# Altium PCB Hack_Final.PcbDoc (part 3 of 3)
Units mm, origin at the board's own origin, x right, y up, seen from the top; angles counter-clockwise.
Board outline 325.37 x 149.48 mm, 4 copper layers (Top Layer, Layer 1, Layer 2, Bottom Layer), stack 0.603 mm thick; 363 components, 196 nets, 927 pads, 198 vias.
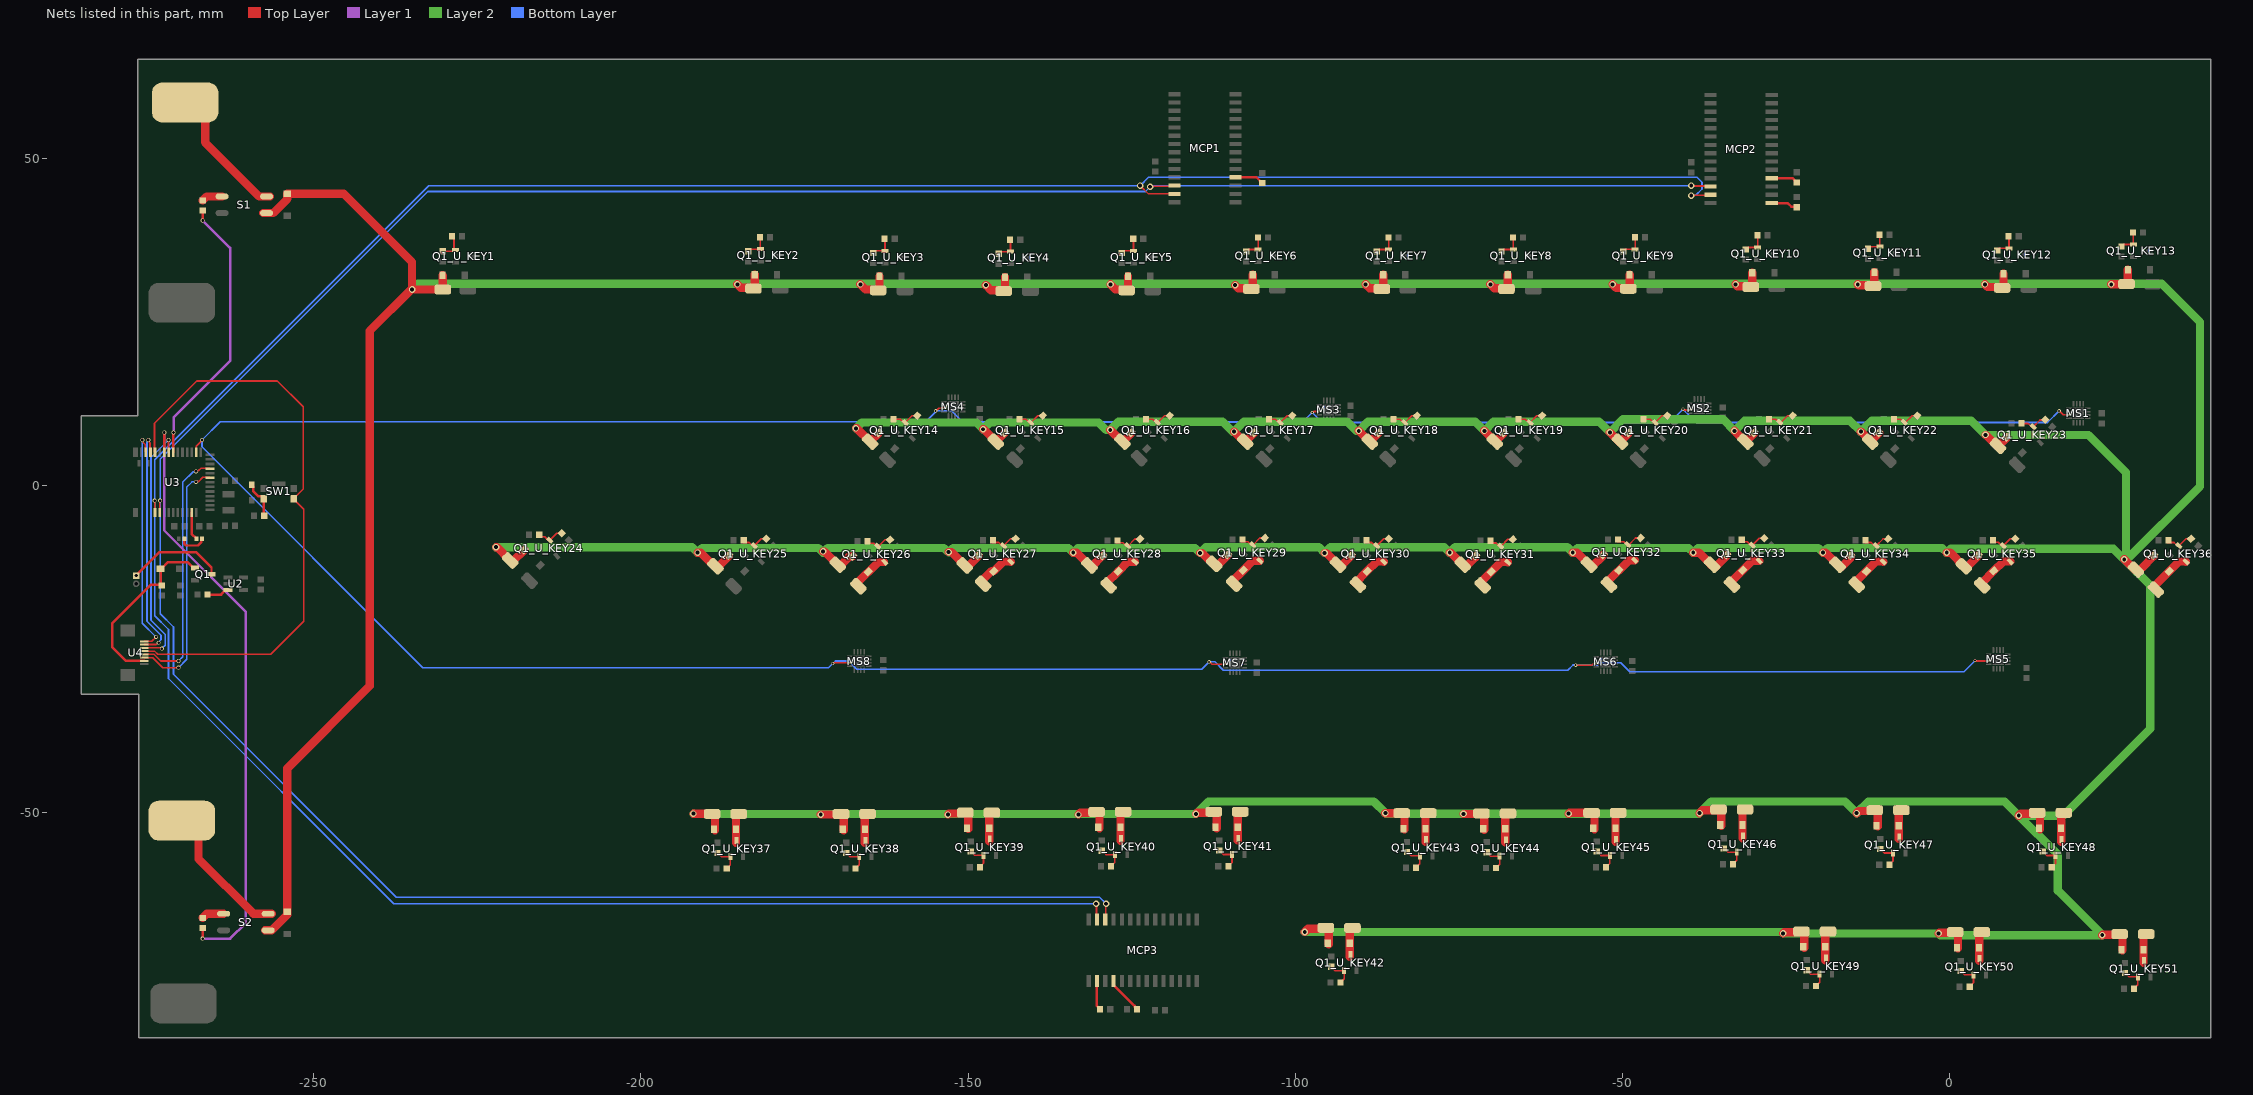
[diagram p5: the nets of this part, all layers, seen from the top]

## Via types
v1: diameter 0.5, hole 0.3, Top Layer to Bottom Layer, 91 vias
v2: diameter 1, hole 0.6, Top Layer to Bottom Layer, 72 vias
v3: diameter 0.6, hole 0.4, Top Layer to Bottom Layer, 35 vias

## Nets (pads, with @x,y where several pads share a name; then routed paths per layer and width w, separated by ;. In a path a pad name is that pad's centre, name@x,y a point inside that pad or via, vN(x,y) a via of type N, cw(c..) or ccw(c..) an arc to the next point about the centre after c; other vN are vias at no path point) (continued)
NetD1_U_KEY26_2: D1_U_KEY26.2 P-_U_KEY26.1 Q1_U_KEY26.3 | length 5.6
  Top Layer w1.27: P-_U_KEY26.1@-167.025,-14.986 -163.707,-11.668 Q1_U_KEY26.3@-162.83,-11.668
NetD1_U_KEY27_2: D1_U_KEY27.2 P-_U_KEY27.1 Q1_U_KEY27.3 | length 6.2
  Top Layer w1.27: P-_U_KEY27.1@-147.701,-14.986 -147.917,-14.77 -147.917,-14.59 -146.38,-13.053 D1_U_KEY27.2@-146.041,-13.053 -144.572,-11.584 -143.52,-11.584 Q1_U_KEY27.3@-143.496,-11.607
NetD1_U_KEY28_2: D1_U_KEY28.2 P-_U_KEY28.1 Q1_U_KEY28.3 | length 5.7
  Top Layer w1.27: P-_U_KEY28.1@-128.841,-14.888 D1_U_KEY28.2@-127.035,-13.082 -125.566,-11.613 -124.514,-11.613 Q1_U_KEY28.3@-124.49,-11.637
NetD1_U_KEY29_2: D1_U_KEY29.2 P-_U_KEY29.1 Q1_U_KEY29.3 | length 5.7
  Top Layer w1.27: P-_U_KEY29.1@-109.748,-14.732 D1_U_KEY29.2@-107.941,-12.926 -106.472,-11.457 -105.42,-11.457 Q1_U_KEY29.3@-105.396,-11.48
NetD1_U_KEY30_2: D1_U_KEY30.2 P-_U_KEY30.1 Q1_U_KEY30.3 | length 5.7
  Top Layer w1.27: P-_U_KEY30.1@-90.825,-14.859 D1_U_KEY30.2@-89.018,-13.053 -87.549,-11.584 -86.497,-11.584 Q1_U_KEY30.3@-86.473,-11.607
NetD1_U_KEY31_2: D1_U_KEY31.2 P-_U_KEY31.1 Q1_U_KEY31.3 | length 5.5
  Top Layer w1.27: P-_U_KEY31.1@-71.628,-14.859 -71.628,-14.712 D1_U_KEY31.2@-70.05,-13.135 -68.581,-11.665 -67.529,-11.665 Q1_U_KEY31.3@-67.505,-11.689
NetD1_U_KEY32_2: D1_U_KEY32.2 P-_U_KEY32.1 Q1_U_KEY32.3 | length 5.6
  Top Layer w1.27: P-_U_KEY32.1@-52.344,-14.732 -49.026,-11.414 Q1_U_KEY32.3@-48.149,-11.414
NetD1_U_KEY33_2: D1_U_KEY33.2 P-_U_KEY33.1 Q1_U_KEY33.3 | length 5.7
  Top Layer w1.27: P-_U_KEY33.1@-33.464,-14.761 D1_U_KEY33.2@-31.658,-12.955 -30.189,-11.486 -29.137,-11.486 Q1_U_KEY33.3@-29.113,-11.51
NetD1_U_KEY34_2: D1_U_KEY34.2 P-_U_KEY34.1 Q1_U_KEY34.3 | length 5.7
  Top Layer w1.27: P-_U_KEY34.1@-14.526,-14.868 D1_U_KEY34.2@-12.72,-13.061 -11.25,-11.592 -10.198,-11.592 Q1_U_KEY34.3@-10.174,-11.616
NetD1_U_KEY35_2: D1_U_KEY35.2 P-_U_KEY35.1 Q1_U_KEY35.3 | length 5.7
  Top Layer w1.27: P-_U_KEY35.1@4.905,-14.843 D1_U_KEY35.2@6.711,-13.037 8.181,-11.568 9.233,-11.568 Q1_U_KEY35.3@9.257,-11.591
NetD1_U_KEY36_2: D1_U_KEY36.2 P-_U_KEY36.1 Q1_U_KEY36.3 | length 5.7
  Top Layer w1.27: 31.75,-14.859 35.025,-11.584 36.078,-11.584 Q1_U_KEY36.3@36.101,-11.607
NetD1_U_KEY37_2: D1_U_KEY37.2 P-_U_KEY37.1 Q1_U_KEY37.3 | length 4.3
  Top Layer w1.27: Q1_U_KEY37.3@-185.445,-54.566 D1_U_KEY37.2@-185.445,-52.534 P-_U_KEY37.1@-185.445,-50.289 ; P-_U_KEY37.1@-185.359,-50.121 P-_U_KEY37.1@-185.318,-50.162
NetD1_U_KEY38_2: D1_U_KEY38.2 P-_U_KEY38.1 Q1_U_KEY38.3 | length 4.3
  Top Layer w1.27: Q1_U_KEY38.3@-165.76,-54.566 D1_U_KEY38.2@-165.76,-52.534 P-_U_KEY38.1@-165.76,-50.289 ; P-_U_KEY38.1@-165.674,-50.121 P-_U_KEY38.1@-165.633,-50.162
NetD1_U_KEY39_2: D1_U_KEY39.2 P-_U_KEY39.1 Q1_U_KEY39.3 | length 4.3
  Top Layer w1.27: Q1_U_KEY39.3@-146.771,-54.356 D1_U_KEY39.2@-146.771,-52.324 P-_U_KEY39.1@-146.771,-50.079 ; P-_U_KEY39.1@-146.685,-49.911 P-_U_KEY39.1@-146.644,-49.952
NetD1_U_KEY40_2: D1_U_KEY40.2 P-_U_KEY40.1 Q1_U_KEY40.3 | length 4.3
  Top Layer w1.27: Q1_U_KEY40.3@-126.708,-54.246 D1_U_KEY40.2@-126.708,-52.214 P-_U_KEY40.1@-126.708,-49.97 ; P-_U_KEY40.1@-126.622,-49.801 P-_U_KEY40.1@-126.581,-49.843
NetD1_U_KEY41_2: D1_U_KEY41.2 P-_U_KEY41.1 Q1_U_KEY41.3 | length 4.3
  Top Layer w1.27: Q1_U_KEY41.3@-108.798,-54.229 D1_U_KEY41.2@-108.798,-52.197 P-_U_KEY41.1@-108.798,-49.952 ; P-_U_KEY41.1@-108.712,-49.784 P-_U_KEY41.1@-108.671,-49.825
NetD1_U_KEY42_2: D1_U_KEY42.2 P-_U_KEY42.1 Q1_U_KEY42.3 | length 4.3
  Top Layer w1.27: Q1_U_KEY42.3@-91.669,-71.973 D1_U_KEY42.2@-91.669,-69.941 P-_U_KEY42.1@-91.669,-67.696 ; P-_U_KEY42.1@-91.584,-67.528 P-_U_KEY42.1@-91.542,-67.569
NetD1_U_KEY43_2: D1_U_KEY43.2 P-_U_KEY43.1 Q1_U_KEY43.3 | length 4.3
  Top Layer w1.27: Q1_U_KEY43.3@-80.096,-54.448 D1_U_KEY43.2@-80.096,-52.416 P-_U_KEY43.1@-80.096,-50.171 ; P-_U_KEY43.1@-80.01,-50.003 P-_U_KEY43.1@-79.969,-50.044
NetD1_U_KEY44_2: D1_U_KEY44.2 P-_U_KEY44.1 Q1_U_KEY44.3 | length 4.3
  Top Layer w1.27: Q1_U_KEY44.3@-67.904,-54.483 D1_U_KEY44.2@-67.904,-52.451 P-_U_KEY44.1@-67.904,-50.206 ; P-_U_KEY44.1@-67.818,-50.038 P-_U_KEY44.1@-67.777,-50.079
NetD1_U_KEY45_2: D1_U_KEY45.2 P-_U_KEY45.1 Q1_U_KEY45.3 | length 4.3
  Top Layer w1.27: Q1_U_KEY45.3@-51.074,-54.391 D1_U_KEY45.2@-51.074,-52.359 P-_U_KEY45.1@-51.074,-50.114 ; P-_U_KEY45.1@-50.988,-49.946 P-_U_KEY45.1@-50.947,-49.987
NetD1_U_KEY46_2: D1_U_KEY46.2 P-_U_KEY46.1 Q1_U_KEY46.3 | length 4.3
  Top Layer w1.27: Q1_U_KEY46.3@-31.677,-53.883 D1_U_KEY46.2@-31.677,-51.851 P-_U_KEY46.1@-31.677,-49.606 ; P-_U_KEY46.1@-31.591,-49.438 P-_U_KEY46.1@-31.55,-49.479
NetD1_U_KEY47_2: D1_U_KEY47.2 P-_U_KEY47.1 Q1_U_KEY47.3 | length 4.3
  Top Layer w1.27: Q1_U_KEY47.3@-7.806,-53.993 D1_U_KEY47.2@-7.806,-51.961 P-_U_KEY47.1@-7.806,-49.716 ; P-_U_KEY47.1@-7.72,-49.548 P-_U_KEY47.1@-7.679,-49.589
NetD1_U_KEY48_2: D1_U_KEY48.2 P-_U_KEY48.1 Q1_U_KEY48.3 | length 4.3
  Top Layer w1.27: Q1_U_KEY48.3@17.019,-54.391 D1_U_KEY48.2@17.019,-52.359 P-_U_KEY48.1@17.019,-50.114 ; P-_U_KEY48.1@17.104,-49.946 P-_U_KEY48.1@17.146,-49.987
NetD1_U_KEY49_2: D1_U_KEY49.2 P-_U_KEY49.1 Q1_U_KEY49.3 | length 4.3
  Top Layer w1.27: Q1_U_KEY49.3@-19.009,-72.517 D1_U_KEY49.2@-19.009,-70.485 P-_U_KEY49.1@-19.009,-68.24 ; P-_U_KEY49.1@-18.923,-68.072 P-_U_KEY49.1@-18.882,-68.113
NetD1_U_KEY50_2: D1_U_KEY50.2 P-_U_KEY50.1 Q1_U_KEY50.3 | length 4.3
  Top Layer w1.27: Q1_U_KEY50.3@4.486,-72.609 D1_U_KEY50.2@4.486,-70.577 P-_U_KEY50.1@4.486,-68.332 ; P-_U_KEY50.1@4.572,-68.164 P-_U_KEY50.1@4.613,-68.205
NetD1_U_KEY51_2: D1_U_KEY51.2 P-_U_KEY51.1 Q1_U_KEY51.3 | length 4.3
  Top Layer w1.27: Q1_U_KEY51.3@29.611,-72.915 D1_U_KEY51.2@29.611,-70.883 P-_U_KEY51.1@29.611,-68.639 ; P-_U_KEY51.1@29.696,-68.47 P-_U_KEY51.1@29.738,-68.512
NetD2_1: D2.1 R5.1 SW1.1 | length 5.8
  Top Layer w0.381: D2.1@-259.437,0.16 -259.437,0.075 -259.207,-0.155 -259.207,-0.886 -258.439,-1.654 -257.937,-1.654 -257.627,-1.964 SW1.1@-257.627,-2.014 -257.584,-2.057 -257.584,-4.528 R5.1@-257.54,-4.572
NetL1_1: L1.1 U3.10 | length 4.3
  Top Layer w0.381: U3.10@-268.626,-4.092 -268.626,-7.364 -267.887,-8.103 L1.1@-267.887,-8.128
NetL1_2: L1.2 L2.1 | length 4.2
  Top Layer w0.381: L2.1@-269.748,-8.128 -269.748,-8.89 -269.494,-9.144 -267.649,-9.144 -267.142,-8.637 -267.142,-8.234 L1.2@-267.037,-8.128
NetMCP1_18: MCP1.18 R6.2 | length 4.5
  Top Layer w0.381: MCP1.18@-109.117,47.117 -105.951,47.117 -105.054,46.22 R6.2@-105.029,46.22
NetMCP2_15: MCP2.15 R8.1 | length 4.1
  Top Layer w0.381: MCP2.15@-27.202,43.18 -24.765,43.18 -24.206,42.621 -23.452,42.621 R8.1@-23.368,42.537
NetMCP2_18: MCP2.18 R7.2 | length 4.1
  Top Layer w0.381: MCP2.18@-27.202,46.99 -24.036,46.99 -23.393,46.347 R7.2@-23.368,46.347
NetMCP3_16: MCP3.16 R10.1 | length 4.5
  Top Layer w0.381: MCP3.16@-130.302,-75.668 -130.302,-79.493 -129.81,-79.985 R10.1@-129.81,-80.01
NetMCP3_18: MCP3.18 R9.2 | length 5.8
  Top Layer w0.381: MCP3.18@-127.762,-75.668 -127.762,-76.268 -124.536,-79.494 -124.536,-79.672 R9.2@-124.198,-80.01
NetQ1_U_KEY1_1: Q1_U_KEY1.1 R1_U_KEY1.2 R2_U_KEY1.2 | length 4.3
  Top Layer w0.254: R2_U_KEY1.2@-230.251,35.822 -228.726,35.822 -228.546,36.002 Q1_U_KEY1.1@-228.373,36.002 ; R1_U_KEY1.2@-228.862,38.1 -228.546,37.784 -228.546,36.175 Q1_U_KEY1.1@-228.373,36.002 ; Q1_U_KEY1.1@-228.311,36.002 Q1_U_KEY1.1@-228.373,36.002
NetQ1_U_KEY2_1: Q1_U_KEY2.1 R1_U_KEY2.2 R2_U_KEY2.2 | length 3.8
  Top Layer w0.254: R2_U_KEY2.2@-183.556,35.822 -183.249,36.129 Q1_U_KEY2.1@-181.743,36.129 -181.743,37.93 R1_U_KEY2.2@-181.786,37.973
NetQ1_U_KEY3_1: Q1_U_KEY3.1 R1_U_KEY3.2 R2_U_KEY3.2 | length 3.8
  Top Layer w0.254: R2_U_KEY3.2@-164.506,35.568 -164.199,35.875 Q1_U_KEY3.1@-162.693,35.875 -162.693,37.676 R1_U_KEY3.2@-162.736,37.719
NetQ1_U_KEY4_1: Q1_U_KEY4.1 R1_U_KEY4.2 R2_U_KEY4.2 | length 3.8
  Top Layer w0.254: R2_U_KEY4.2@-145.329,35.441 -145.022,35.748 Q1_U_KEY4.1@-143.516,35.748 -143.516,37.549 R1_U_KEY4.2@-143.559,37.592
NetQ1_U_KEY5_1: Q1_U_KEY5.1 R1_U_KEY5.2 R2_U_KEY5.2 | length 3.8
  Top Layer w0.254: R2_U_KEY5.2@-126.533,35.568 -126.226,35.875 Q1_U_KEY5.1@-124.72,35.875 -124.72,37.676 R1_U_KEY5.2@-124.763,37.719
NetQ1_U_KEY6_1: Q1_U_KEY6.1 R1_U_KEY6.2 R2_U_KEY6.2 | length 3.8
  Top Layer w0.254: R2_U_KEY6.2@-107.483,35.771 -107.176,36.078 Q1_U_KEY6.1@-105.67,36.078 -105.67,37.879 R1_U_KEY6.2@-105.713,37.922
NetQ1_U_KEY7_1: Q1_U_KEY7.1 R1_U_KEY7.2 R2_U_KEY7.2 | length 3.8
  Top Layer w0.254: R2_U_KEY7.2@-87.544,35.771 -87.237,36.078 Q1_U_KEY7.1@-85.731,36.078 -85.731,37.879 R1_U_KEY7.2@-85.774,37.922
NetQ1_U_KEY8_1: Q1_U_KEY8.1 R1_U_KEY8.2 R2_U_KEY8.2 | length 3.8
  Top Layer w0.254: R2_U_KEY8.2@-68.494,35.771 -68.187,36.078 Q1_U_KEY8.1@-66.681,36.078 -66.681,37.879 R1_U_KEY8.2@-66.724,37.922
NetQ1_U_KEY9_1: Q1_U_KEY9.1 R1_U_KEY9.2 R2_U_KEY9.2 | length 3.8
  Top Layer w0.254: R2_U_KEY9.2@-49.892,35.807 -49.585,36.114 Q1_U_KEY9.1@-48.079,36.114 -48.079,37.915 R1_U_KEY9.2@-48.122,37.958
NetQ1_U_KEY10_1: Q1_U_KEY10.1 R1_U_KEY10.2 R2_U_KEY10.2 | length 3.8
  Top Layer w0.254: R2_U_KEY10.2@-31.156,36.081 -30.849,36.388 Q1_U_KEY10.1@-29.343,36.388 -29.343,38.189 R1_U_KEY10.2@-29.386,38.232
NetQ1_U_KEY11_1: Q1_U_KEY11.1 R1_U_KEY11.2 R2_U_KEY11.2 | length 3.8
  Top Layer w0.254: R2_U_KEY11.2@-12.487,36.203 -12.18,36.51 Q1_U_KEY11.1@-10.674,36.51 -10.674,38.311 R1_U_KEY11.2@-10.717,38.354
NetQ1_U_KEY12_1: Q1_U_KEY12.1 R1_U_KEY12.2 R2_U_KEY12.2 | length 3.8
  Top Layer w0.254: R2_U_KEY12.2@7.239,35.949 7.546,36.256 Q1_U_KEY12.1@9.052,36.256 9.052,38.057 R1_U_KEY12.2@9.009,38.1
NetQ1_U_KEY13_1: Q1_U_KEY13.1 R1_U_KEY13.2 R2_U_KEY13.2 | length 3.8
  Top Layer w0.254: R2_U_KEY13.2@26.248,36.533 26.555,36.84 Q1_U_KEY13.1@28.061,36.84 28.061,38.641 R1_U_KEY13.2@28.018,38.684
NetQ1_U_KEY14_1: Q1_U_KEY14.1 R1_U_KEY14.2 R2_U_KEY14.2 | length 4.2
  Top Layer w0.254: R2_U_KEY14.2@-161.363,10.153 -160.353,10.153 -159.845,9.645 Q1_U_KEY14.1@-159.601,9.645 -158.558,10.687 -157.788,10.687 R1_U_KEY14.2@-157.77,10.704
NetQ1_U_KEY15_1: Q1_U_KEY15.1 R1_U_KEY15.2 R2_U_KEY15.2 | length 4.2
  Top Layer w0.254: R2_U_KEY15.2@-142.151,10.153 -141.141,10.153 -140.633,9.645 Q1_U_KEY15.1@-140.389,9.645 -139.346,10.687 -138.576,10.687 R1_U_KEY15.2@-138.559,10.704
NetQ1_U_KEY16_1: Q1_U_KEY16.1 R1_U_KEY16.2 R2_U_KEY16.2 | length 4.2
  Top Layer w0.254: R2_U_KEY16.2@-122.791,10.153 -121.782,10.153 -121.274,9.645 -121.029,9.645 -119.987,10.687 -119.217,10.687 R1_U_KEY16.2@-119.199,10.704
NetQ1_U_KEY17_1: Q1_U_KEY17.1 R1_U_KEY17.2 R2_U_KEY17.2 | length 4.2
  Top Layer w0.254: R2_U_KEY17.2@-104.037,10.153 -103.028,10.153 -102.52,9.645 Q1_U_KEY17.1@-102.275,9.645 -101.233,10.687 -100.463,10.687 R1_U_KEY17.2@-100.445,10.704
NetQ1_U_KEY18_1: Q1_U_KEY18.1 R1_U_KEY18.2 R2_U_KEY18.2 | length 4.2
  Top Layer w0.254: R2_U_KEY18.2@-85.006,10.153 -83.997,10.153 -83.489,9.645 Q1_U_KEY18.1@-83.244,9.645 -82.202,10.687 -81.432,10.687 R1_U_KEY18.2@-81.414,10.704
NetQ1_U_KEY19_1: Q1_U_KEY19.1 R1_U_KEY19.2 R2_U_KEY19.2 | length 4.2
  Top Layer w0.254: R2_U_KEY19.2@-65.894,10.153 -64.885,10.153 -64.377,9.645 Q1_U_KEY19.1@-64.132,9.645 -63.09,10.687 -62.32,10.687 R1_U_KEY19.2@-62.302,10.704
NetQ1_U_KEY20_1: Q1_U_KEY20.1 R1_U_KEY20.2 R2_U_KEY20.2 | length 4.2
  Top Layer w0.254: R2_U_KEY20.2@-46.774,10.153 -45.764,10.153 -45.256,9.645 Q1_U_KEY20.1@-45.012,9.645 -43.969,10.687 -43.199,10.687 R1_U_KEY20.2@-43.182,10.704
NetQ1_U_KEY21_1: Q1_U_KEY21.1 R1_U_KEY21.2 R2_U_KEY21.2 | length 4.2
  Top Layer w0.254: R2_U_KEY21.2@-27.602,10.153 -26.593,10.153 -26.085,9.645 -25.84,9.645 -24.798,10.687 -24.028,10.687 R1_U_KEY21.2@-24.01,10.704
NetQ1_U_KEY22_1: Q1_U_KEY22.1 R1_U_KEY22.2 R2_U_KEY22.2 | length 4.2
  Top Layer w0.254: R2_U_KEY22.2@-8.547,10.153 -7.537,10.153 -7.029,9.645 -6.785,9.645 -5.742,10.687 -4.972,10.687 R1_U_KEY22.2@-4.955,10.704
NetQ1_U_KEY23_1: Q1_U_KEY23.1 R1_U_KEY23.2 R2_U_KEY23.2 | length 4.2
  Top Layer w0.254: R2_U_KEY23.2@10.984,9.508 11.993,9.508 12.501,9 Q1_U_KEY23.1@12.746,9 13.788,10.042 14.558,10.042 R1_U_KEY23.2@14.576,10.06
NetQ1_U_KEY24_1: Q1_U_KEY24.1 R1_U_KEY24.2 R2_U_KEY24.2 | length 4.3
  Top Layer w0.254: R2_U_KEY24.2@-215.684,-7.82 -214.674,-7.82 -214.166,-8.328 Q1_U_KEY24.1@-213.922,-8.328 -212.862,-7.268 -212.605,-7.268 -212.587,-7.286 -212.57,-7.268 R1_U_KEY24.2@-212.092,-7.268
NetQ1_U_KEY25_1: Q1_U_KEY25.1 R1_U_KEY25.2 R2_U_KEY25.2 | length 4.3
  Top Layer w0.254: R2_U_KEY25.2@-184.433,-8.681 -183.424,-8.681 -182.916,-9.189 Q1_U_KEY25.1@-182.671,-9.189 -181.611,-8.129 -181.354,-8.129 -181.337,-8.147 -181.319,-8.129 R1_U_KEY25.2@-180.841,-8.129
NetQ1_U_KEY26_1: Q1_U_KEY26.1 R1_U_KEY26.2 R2_U_KEY26.2 | length 4.2
  Top Layer w0.254: R2_U_KEY26.2@-165.345,-8.481 -165.051,-8.775 -164.388,-8.775 -163.847,-9.316 -163.748,-9.316 -162.688,-8.256 -162.431,-8.256 -162.414,-8.274 -162.396,-8.256 R1_U_KEY26.2@-161.918,-8.256
NetQ1_U_KEY27_1: Q1_U_KEY27.1 R1_U_KEY27.2 R2_U_KEY27.2 | length 4.3
  Top Layer w0.254: R2_U_KEY27.2@-146.333,-8.681 -145.324,-8.681 -144.816,-9.189 Q1_U_KEY27.1@-144.571,-9.189 -143.511,-8.129 -143.254,-8.129 -143.237,-8.147 -143.219,-8.129 R1_U_KEY27.2@-142.741,-8.129
NetQ1_U_KEY28_1: Q1_U_KEY28.1 R1_U_KEY28.2 R2_U_KEY28.2 | length 4.3
  Top Layer w0.254: R2_U_KEY28.2@-127.327,-8.71 -126.317,-8.71 -125.809,-9.218 Q1_U_KEY28.1@-125.565,-9.218 -124.505,-8.158 -124.248,-8.158 -124.23,-8.176 -124.212,-8.158 R1_U_KEY28.2@-123.734,-8.158
NetQ1_U_KEY29_1: Q1_U_KEY29.1 R1_U_KEY29.2 R2_U_KEY29.2 | length 4.3
  Top Layer w0.254: R2_U_KEY29.2@-108.233,-8.554 -107.224,-8.554 -106.716,-9.062 Q1_U_KEY29.1@-106.471,-9.062 -105.411,-8.002 -105.154,-8.002 -105.137,-8.02 -105.119,-8.002 R1_U_KEY29.2@-104.641,-8.002
NetQ1_U_KEY30_1: Q1_U_KEY30.1 R1_U_KEY30.2 R2_U_KEY30.2 | length 4.3
  Top Layer w0.254: R2_U_KEY30.2@-89.31,-8.681 -88.301,-8.681 -87.793,-9.189 Q1_U_KEY30.1@-87.548,-9.189 -86.488,-8.129 -86.231,-8.129 -86.214,-8.147 -86.196,-8.129 R1_U_KEY30.2@-85.718,-8.129
NetQ1_U_KEY31_1: Q1_U_KEY31.1 R1_U_KEY31.2 R2_U_KEY31.2 | length 4.3
  Top Layer w0.254: R2_U_KEY31.2@-70.342,-8.763 -69.333,-8.763 -68.825,-9.271 Q1_U_KEY31.1@-68.58,-9.271 -67.52,-8.211 -67.263,-8.211 -67.246,-8.229 -67.228,-8.211 R1_U_KEY31.2@-66.75,-8.211
NetQ1_U_KEY32_1: Q1_U_KEY32.1 R1_U_KEY32.2 R2_U_KEY32.2 | length 4.3
  Top Layer w0.254: R2_U_KEY32.2@-50.829,-8.554 -49.82,-8.554 -49.312,-9.062 -49.067,-9.062 -48.007,-8.002 -47.75,-8.002 -47.733,-8.02 -47.715,-8.002 R1_U_KEY32.2@-47.237,-8.002
NetQ1_U_KEY33_1: Q1_U_KEY33.1 R1_U_KEY33.2 R2_U_KEY33.2 | length 4.3
  Top Layer w0.254: R2_U_KEY33.2@-31.95,-8.583 -30.94,-8.583 -30.432,-9.091 Q1_U_KEY33.1@-30.188,-9.091 -29.128,-8.031 -28.871,-8.031 -28.853,-8.049 -28.835,-8.031 R1_U_KEY33.2@-28.357,-8.031
NetQ1_U_KEY34_1: Q1_U_KEY34.1 R1_U_KEY34.2 R2_U_KEY34.2 | length 4.3
  Top Layer w0.254: R2_U_KEY34.2@-13.011,-8.69 -12.002,-8.69 -11.494,-9.198 Q1_U_KEY34.1@-11.249,-9.198 -10.189,-8.138 -9.933,-8.138 -9.915,-8.155 -9.897,-8.138 R1_U_KEY34.2@-9.419,-8.138
NetQ1_U_KEY35_1: Q1_U_KEY35.1 R1_U_KEY35.2 R2_U_KEY35.2 | length 4.3
  Top Layer w0.254: R2_U_KEY35.2@6.42,-8.665 7.429,-8.665 7.937,-9.173 Q1_U_KEY35.1@8.182,-9.173 9.242,-8.113 9.498,-8.113 9.516,-8.131 9.534,-8.113 R1_U_KEY35.2@10.012,-8.113
NetQ1_U_KEY36_1: Q1_U_KEY36.1 R1_U_KEY36.2 R2_U_KEY36.2 | length 4.3
  Top Layer w0.254: R2_U_KEY36.2@33.265,-8.681 34.274,-8.681 34.782,-9.189 Q1_U_KEY36.1@35.027,-9.189 36.086,-8.129 36.343,-8.129 36.361,-8.147 36.379,-8.129 R1_U_KEY36.2@36.857,-8.129
NetQ1_U_KEY37_1: Q1_U_KEY37.1 R1_U_KEY37.2 R2_U_KEY37.2 | length 4.3
  Top Layer w0.254: R2_U_KEY37.2@-188.28,-56.098 -188.255,-56.098 -187.663,-56.69 Q1_U_KEY37.1@-186.309,-56.69 -186.309,-57.912 -186.875,-58.478 R1_U_KEY37.2@-186.875,-58.503
NetQ1_U_KEY38_1: Q1_U_KEY38.1 R1_U_KEY38.2 R2_U_KEY38.2 | length 4.3
  Top Layer w0.254: R2_U_KEY38.2@-168.595,-56.098 -168.57,-56.098 -167.978,-56.69 Q1_U_KEY38.1@-166.624,-56.69 -166.624,-57.912 -167.19,-58.478 R1_U_KEY38.2@-167.19,-58.503
NetQ1_U_KEY39_1: Q1_U_KEY39.1 R1_U_KEY39.2 R2_U_KEY39.2 | length 4.3
  Top Layer w0.254: R2_U_KEY39.2@-149.606,-55.888 -149.581,-55.888 -148.989,-56.48 Q1_U_KEY39.1@-147.635,-56.48 -147.635,-57.702 -148.201,-58.268 R1_U_KEY39.2@-148.201,-58.293
NetQ1_U_KEY40_1: Q1_U_KEY40.1 R1_U_KEY40.2 R2_U_KEY40.2 | length 4.3
  Top Layer w0.254: R2_U_KEY40.2@-129.543,-55.778 -129.518,-55.778 -128.926,-56.37 Q1_U_KEY40.1@-127.572,-56.37 -127.572,-57.592 -128.138,-58.158 R1_U_KEY40.2@-128.138,-58.183
NetQ1_U_KEY41_1: Q1_U_KEY41.1 R1_U_KEY41.2 R2_U_KEY41.2 | length 4.3
  Top Layer w0.254: R2_U_KEY41.2@-111.633,-55.761 -111.608,-55.761 -111.016,-56.353 Q1_U_KEY41.1@-109.662,-56.353 -109.662,-57.575 -110.228,-58.141 R1_U_KEY41.2@-110.228,-58.166
NetQ1_U_KEY42_1: Q1_U_KEY42.1 R1_U_KEY42.2 R2_U_KEY42.2 | length 4.3
  Top Layer w0.254: R2_U_KEY42.2@-94.505,-73.505 -94.48,-73.505 -93.888,-74.097 Q1_U_KEY42.1@-92.534,-74.097 -92.534,-75.318 -93.1,-75.885 R1_U_KEY42.2@-93.1,-75.91
NetQ1_U_KEY43_1: Q1_U_KEY43.1 R1_U_KEY43.2 R2_U_KEY43.2 | length 4.3
  Top Layer w0.254: R2_U_KEY43.2@-82.931,-55.98 -82.906,-55.98 -82.314,-56.572 Q1_U_KEY43.1@-80.96,-56.572 -80.96,-57.794 -81.526,-58.36 R1_U_KEY43.2@-81.526,-58.385
NetQ1_U_KEY44_1: Q1_U_KEY44.1 R1_U_KEY44.2 R2_U_KEY44.2 | length 4.3
  Top Layer w0.254: R2_U_KEY44.2@-70.739,-56.015 -70.714,-56.015 -70.122,-56.607 Q1_U_KEY44.1@-68.768,-56.607 -68.768,-57.829 -69.334,-58.395 R1_U_KEY44.2@-69.334,-58.42
NetQ1_U_KEY45_1: Q1_U_KEY45.1 R1_U_KEY45.2 R2_U_KEY45.2 | length 4.3
  Top Layer w0.254: R2_U_KEY45.2@-53.909,-55.923 -53.884,-55.923 -53.292,-56.515 Q1_U_KEY45.1@-51.938,-56.515 -51.938,-57.737 -52.504,-58.303 R1_U_KEY45.2@-52.504,-58.328
NetQ1_U_KEY46_1: Q1_U_KEY46.1 R1_U_KEY46.2 R2_U_KEY46.2 | length 4.3
  Top Layer w0.254: R2_U_KEY46.2@-34.512,-55.415 -34.487,-55.415 -33.895,-56.007 Q1_U_KEY46.1@-32.541,-56.007 -32.541,-57.229 -33.107,-57.795 R1_U_KEY46.2@-33.107,-57.82
NetQ1_U_KEY47_1: Q1_U_KEY47.1 R1_U_KEY47.2 R2_U_KEY47.2 | length 4.3
  Top Layer w0.254: R2_U_KEY47.2@-10.641,-55.525 -10.616,-55.525 -10.024,-56.117 Q1_U_KEY47.1@-8.67,-56.117 -8.67,-57.339 -9.236,-57.905 R1_U_KEY47.2@-9.236,-57.93
NetQ1_U_KEY48_1: Q1_U_KEY48.1 R1_U_KEY48.2 R2_U_KEY48.2 | length 4.3
  Top Layer w0.254: R2_U_KEY48.2@14.183,-55.923 14.208,-55.923 14.801,-56.515 Q1_U_KEY48.1@16.154,-56.515 16.154,-57.737 15.588,-58.303 R1_U_KEY48.2@15.588,-58.328
NetQ1_U_KEY49_1: Q1_U_KEY49.1 R1_U_KEY49.2 R2_U_KEY49.2 | length 4.3
  Top Layer w0.254: R2_U_KEY49.2@-21.844,-74.049 -21.819,-74.049 -21.227,-74.641 Q1_U_KEY49.1@-19.873,-74.641 -19.873,-75.863 -20.439,-76.429 R1_U_KEY49.2@-20.439,-76.454
NetQ1_U_KEY50_1: Q1_U_KEY50.1 R1_U_KEY50.2 R2_U_KEY50.2 | length 4.3
  Top Layer w0.254: R2_U_KEY50.2@1.651,-74.141 1.676,-74.141 2.268,-74.733 Q1_U_KEY50.1@3.622,-74.733 3.622,-75.955 3.056,-76.521 R1_U_KEY50.2@3.056,-76.546
NetQ1_U_KEY51_1: Q1_U_KEY51.1 R1_U_KEY51.2 R2_U_KEY51.2 | length 4.3
  Top Layer w0.254: R2_U_KEY51.2@26.775,-74.447 26.8,-74.447 27.392,-75.039 Q1_U_KEY51.1@28.746,-75.039 28.746,-76.261 28.18,-76.827 R1_U_KEY51.2@28.18,-76.852
NetR2_1: R2.1 U2.3 | length 3.4
  Top Layer w0.381: R2.1@-266.184,-16.637 -264.135,-16.637 -263.434,-15.936 U2.3@-263.059,-15.936
NetR11_2: R11.2 S1.1 | length 3.2
  Top Layer w1.27: R11.2@-266.954,43.569 -266.327,44.196 S1.1@-263.975,44.196
NetR12_2: R12.2 S2.1 | length 3.5
  Top Layer w1.27: R12.2@-266.954,-66.04 -266.319,-65.405 S2.1@-263.75,-65.405
RESET: SW1.3 U3.35 U4.4 | length 92.1
  Top Layer w0.254: U4.4@-275.887,-25.277 -274.315,-25.277 -273.811,-25.781 -256.54,-25.781 -251.499,-20.74 -251.499,-3.591 -252.653,-2.437 -253.027,-2.064 SW1.3@-253.027,-2.014 -253.027,-1.964 -251.587,-0.523 -251.587,12.043 -255.546,16.002 -267.843,16.002 -274.296,9.549 U3.35@-274.296,5.167
RXD: U3.21 U4.5 | length 38.3
  Top Layer w0.254: U4.5@-275.887,-25.777 -274.387,-25.777 -273.367,-26.797 v3(-270.637,-26.797) ; v3(-267.97,2.191) -267.904,2.257 -267.618,2.257 -267.208,2.667 U3.21@-265.896,2.667
  Bottom Layer w0.254: v3(-270.637,-26.797) -270.002,-26.162 -270.002,0.553 -268.408,2.147 -268.014,2.147 v3(-267.97,2.191)
SCK: MS1.3 MS2.3 MS3.3 MS4.3 MS5.3 MS6.3 MS7.3 MS8.3 U3.26 | length 597.6
  Top Layer w0.254: U3.26@-267.996,5.167 -267.923,5.24 -267.923,5.999 -267.219,6.703 ; v1(-170.688,-27.178) -170.621,-27.178 -170.49,-27.047 MS8.3@-168.059,-27.047 ; v1(-154.94,11.43) -154.873,11.43 -154.484,11.819 MS4.3@-153.67,11.819 ; v1(-113.157,-26.924) -113.09,-26.924 -112.713,-27.301 MS7.3@-110.655,-27.301 ; v1(-97.409,11.176) -97.342,11.176 -97.193,11.326 MS3.3@-96.342,11.326 ; v1(-57.15,-27.432) -54.704,-27.432 -54.539,-27.267 -54.406,-27.267 -54.313,-27.174 MS6.3@-54.013,-27.174 ; v1(-40.767,11.684) -40.7,11.684 -40.565,11.549 MS2.3@-39.7,11.549 ; v1(3.853,-26.718) 3.919,-26.718 4.004,-26.803 MS5.3@5.986,-26.803 ; v1(16.726,11.442) 17.357,10.811 MS1.3@18.212,10.811
  Bottom Layer w0.254: v1(-154.94,11.43) -152.527,11.43 -150.83,9.733 -98.852,9.733 v1(-97.409,11.176) -95.885,9.652 -42.799,9.652 v1(-40.767,11.684) -38.809,9.726 -38.735,9.652 14.936,9.652 v1(16.726,11.442) ; v1@-154.876,11.367 -156.464,9.779 -264.252,9.779 v3(-267.046,6.985) -267.046,5.934 -233.299,-27.813 -171.323,-27.813 v1(-170.688,-27.178) -170.621,-27.178 -170.24,-26.797 -168.275,-26.797 -167.005,-28.067 -114.3,-28.067 v1(-113.157,-26.924) -112.268,-26.924 -110.998,-28.194 -58.365,-28.194 -57.569,-27.398 -57.184,-27.398 v1(-57.15,-27.432) -53.87,-27.432 -53.489,-27.051 -50.275,-27.051 -48.901,-28.425 2.182,-28.425 v1@3.791,-26.816
SCL: MCP1.12 MCP2.12 MCP3.12 U3.3 | length 453.1
  Top Layer w0.254: U3.3@-273.526,-4.092 -273.488,-4.054 -273.488,-2.324 v3(-273.451,-2.286) ; MCP3.12@-129.032,-66.318 -128.969,-66.255 -128.969,-63.944 v2(-128.905,-63.881) ; v2(-122.166,45.677) -122.081,45.762 -118.552,45.762 MCP1.12@-118.467,45.847 ; v2(-39.497,45.847) -39.433,45.783 -36.615,45.783 MCP2.12@-36.552,45.72
  Bottom Layer w0.254: v3(-273.451,-2.286) -273.42,-2.317 -273.42,-19.569 -271.399,-21.59 -271.399,-28.829 -237.363,-62.865 -129.921,-62.865 v2(-128.905,-63.881) ; v3@-273.42,-2.286 -273.42,4.075 -232.537,44.958 -122.885,44.958 -122.023,45.82 -121.671,45.82 -121.644,45.847 v2(-39.497,45.847)
SDA: MCP1.13 MCP2.13 MCP3.13 U3.2 | length 461.1
  Top Layer w0.254: v3(-274.274,-2.286) -274.25,-2.31 -274.25,-4.068 U3.2@-274.226,-4.092 ; v2(-130.429,-63.888) -130.365,-63.952 -130.365,-66.255 MCP3.13@-130.302,-66.318 ; v2(-123.698,45.847) -122.428,44.577 MCP1.13@-118.467,44.577 ; v2(-39.497,44.323) -39.433,44.386 -36.615,44.386 MCP2.13@-36.552,44.45
  Bottom Layer w0.254: v2(-130.429,-63.888) -130.436,-63.881 -237.744,-63.881 -272.161,-29.464 -272.161,-21.971 -274.274,-19.858 v3(-274.274,-2.286) -274.274,3.983 -232.41,45.847 v2(-123.698,45.847) -122.428,47.117 -38.608,47.117 -37.846,46.355 -37.846,45.339 -38.811,44.374 -39.446,44.374 v2(-39.497,44.323)
SWDCLK: U3.36 U4.2 | length 36.3
  Top Layer w0.254: U4.2@-275.887,-24.277 -274.053,-24.277 -273.779,-24.003 v3(-273.685,-24.003) ; v3@-275.302,6.858 -275.2,6.858 -275.167,6.825 -275.167,6.723 -274.996,6.552 U3.36@-274.996,5.167
  Bottom Layer w0.254: v3(-275.233,6.985) -275.233,6.893 -275.463,6.663 -275.463,-20.701 -273.304,-22.86 -273.304,-23.528 -273.685,-23.909 v3(-273.685,-24.003)
SWDIO: U3.37 U4.1 | length 35
  Top Layer w0.254: v3@-276.237,6.858 -276.237,6.83 -275.696,6.289 U3.37@-275.696,5.167 ; U4.1@-275.887,-23.777 -274.729,-23.777 v3(-274.066,-23.114)
  Bottom Layer w0.254: v3(-276.168,6.985) -276.168,-21.012 v3(-274.066,-23.114)
Switch1: R11.1 U3.31 | length 42.2
  Top Layer w0.381: U3.31@-271.426,5.108 -271.417,5.118 -271.417,8.11 v3(-271.399,8.128) ; v3(-266.954,40.513) R11.1@-266.954,42.029
  Layer 1 w0.381: v3(-271.399,8.128) -271.399,10.414 -262.763,19.05 -262.763,36.322 v3(-266.954,40.513)
Switch2: R12.1 U3.33 | length 92.4
  Top Layer w0.381: U3.33@-272.826,5.108 -272.817,5.118 -272.817,8.107 v3(-272.796,8.128) ; v3(-266.954,-69.215) R12.1@-266.954,-67.58
  Layer 1 w0.381: v3(-272.796,8.128) -272.81,8.114 -272.81,-6.844 -260.35,-19.304 -260.35,-66.802 -262.763,-69.215 v3(-266.954,-69.215)
SWO: U3.32 U4.3 | length 38.6
  Top Layer w0.254: U4.3@-275.887,-24.777 -273.386,-24.777 -273.271,-24.892 v3(-273.177,-24.892) ; U3.32@-272.196,5.167 -272.167,5.196 -272.167,6.829 v3@-272.138,6.858
  Bottom Layer w0.254: v3(-273.177,-24.892) -272.669,-24.384 -272.669,-22.733 -274.851,-20.551 -274.851,4.304 v3(-272.17,6.985)
TXD: U3.19 U4.6 | length 38.1
  Top Layer w0.254: U4.6@-275.887,-26.277 -274.586,-26.277 -273.05,-27.813 v3(-270.637,-27.813) ; v3(-267.97,0.572) -267.904,0.638 -267.563,0.638 -266.934,1.267 U3.19@-265.896,1.267
  Bottom Layer w0.254: v3(-270.637,-27.813) -269.367,-26.543 -269.367,-0.212 -268.583,0.572 v3(-267.97,0.572)
VBAT: Q1.3 U1.1 | length 15
  Top Layer w0.381: U1.1@-277.114,-13.736 -273.538,-10.16 -267.97,-10.16 -265.597,-12.533 Q1.3@-265.597,-13.528
VBUSIN: D1.1 Q1.1 R1.2 U4.7 | length 28
  Top Layer w0.381: U4.7@-275.887,-26.777 -278.658,-26.777 -280.797,-24.638 -280.797,-21.082 -274.828,-15.113 R1.2@-273.296,-15.113 ; R1.2@-273.177,-15.232 R1.2@-273.296,-15.113 ; Q1.1@-268.097,-12.578 -268.372,-12.578 -269.266,-11.684 -272.241,-11.684 -273.257,-12.7 D1.1@-273.382,-12.7 -273.382,-15.027 R1.2@-273.296,-15.113
VIN1: P1+.1 S1.4 | length 21.1
  Top Layer w1.27: P1+.1@-269.621,58.547 -268.918,58.547 -266.573,56.202 -266.573,52.451 -258.318,44.196 S1.4@-257.175,44.196 S1.4@-256.667,44.196
VIN2: P2+.1 S2.4 | length 21.7
  Top Layer w1.27: P2+.1@-270.129,-51.181 -269.916,-51.181 -267.571,-53.526 -267.571,-57.041 -259.207,-65.405 S2.4@-256.95,-65.405 S2.4@-256.413,-65.405
VOUT1: D1_U_KEY1.1 D1_U_KEY2.1 D1_U_KEY3.1 D1_U_KEY4.1 D1_U_KEY5.1 D1_U_KEY6.1 D1_U_KEY7.1 D1_U_KEY8.1 D1_U_KEY9.1 D1_U_KEY10.1 D1_U_KEY11.1 D1_U_KEY12.1 D1_U_KEY13.1 D1_U_KEY14.1 D1_U_KEY15.1 D1_U_KEY16.1 D1_U_KEY17.1 D1_U_KEY18.1 D1_U_KEY19.1 D1_U_KEY20.1 D1_U_KEY21.1 D1_U_KEY22.1 D1_U_KEY23.1 D1_U_KEY24.1 D1_U_KEY25.1 D1_U_KEY26.1 D1_U_KEY27.1 D1_U_KEY28.1 D1_U_KEY29.1 D1_U_KEY30.1 D1_U_KEY31.1 D1_U_KEY32.1 D1_U_KEY33.1 D1_U_KEY34.1 D1_U_KEY35.1 D1_U_KEY36.1 D1_U_KEY37.1 D1_U_KEY38.1 D1_U_KEY39.1 D1_U_KEY40.1 D1_U_KEY41.1 D1_U_KEY42.1 D1_U_KEY43.1 D1_U_KEY44.1 D1_U_KEY45.1 D1_U_KEY46.1 D1_U_KEY47.1 D1_U_KEY48.1 D1_U_KEY49.1 D1_U_KEY50.1 D1_U_KEY51.1 DSK1.1 DSK2.1 P+_U_KEY1.1 P+_U_KEY2.1 P+_U_KEY3.1 P+_U_KEY4.1 P+_U_KEY5.1 P+_U_KEY6.1 P+_U_KEY7.1 P+_U_KEY8.1 P+_U_KEY9.1 P+_U_KEY10.1 P+_U_KEY11.1 P+_U_KEY12.1 P+_U_KEY13.1 P+_U_KEY14.1 P+_U_KEY15.1 P+_U_KEY16.1 P+_U_KEY17.1 P+_U_KEY18.1 P+_U_KEY19.1 P+_U_KEY20.1 P+_U_KEY21.1 P+_U_KEY22.1 P+_U_KEY23.1 P+_U_KEY24.1 P+_U_KEY25.1 P+_U_KEY26.1 P+_U_KEY27.1 P+_U_KEY28.1 P+_U_KEY29.1 P+_U_KEY30.1 P+_U_KEY31.1 P+_U_KEY32.1 P+_U_KEY33.1 P+_U_KEY34.1 P+_U_KEY35.1 P+_U_KEY36.1 P+_U_KEY37.1 P+_U_KEY38.1 P+_U_KEY39.1 P+_U_KEY40.1 P+_U_KEY41.1 P+_U_KEY42.1 P+_U_KEY43.1 P+_U_KEY44.1 P+_U_KEY45.1 P+_U_KEY46.1 P+_U_KEY47.1 P+_U_KEY48.1 P+_U_KEY49.1 P+_U_KEY50.1 P+_U_KEY51.1 S1.3 S2.3 | length 1608.3
  Top Layer w1.27: S1.3@-257.683,41.656 S1.3@-257.175,41.656 -256.159,41.656 -254,43.815 DSK1.1@-254,44.618 -245.405,44.618 -234.95,34.163 v2(-234.95,29.972) ; S2.3@-257.429,-67.945 S2.3@-256.95,-67.945 -256.4,-67.945 -254,-65.545 DSK2.1@-254,-65.11 -254,-43.18 -241.427,-30.607 -241.427,23.622 -235.077,29.972 v2(-234.95,29.972) ; D1_U_KEY1.1@-230.292,32.131 -230.251,32.09 P+_U_KEY1.1@-230.251,29.972 v2(-234.95,29.972) ; v2(-222.123,-9.398) -221.996,-9.398 P+_U_KEY24.1@-219.964,-11.43 -219.78,-11.614 -219.601,-11.614 D1_U_KEY24.1@-217.785,-9.799 ; v2(-191.958,-50.123) -188.786,-50.123 -188.661,-50.248 D1_U_KEY37.1@-188.661,-52.661 ; v2(-191.333,-10.239) -190.854,-10.239 -188.775,-12.319 P+_U_KEY25.1@-188.595,-12.319 ; P+_U_KEY25.1@-188.341,-12.573 -186.535,-10.767 D1_U_KEY25.1@-186.535,-10.659 ; v2(-185.253,30.762) -184.717,30.226 -182.921,30.226 P+_U_KEY2.1@-182.794,30.099 -182.709,30.099 -182.582,30.226 D1_U_KEY2.1@-182.582,32.258 ; v2(-172.507,-50.256) -168.984,-50.256 -168.976,-50.248 D1_U_KEY38.1@-168.976,-52.661 ; v2(-172.156,-10.048) -171.943,-10.048 P+_U_KEY26.1@-169.926,-12.065 ; P+_U_KEY26.1@-169.672,-12.319 -168.139,-10.786 D1_U_KEY26.1@-167.612,-10.786 ; v2(-167.132,8.763) -167.005,8.763 P+_U_KEY14.1@-164.973,6.731 -164.953,6.731 D1_U_KEY14.1@-163.63,8.055 ; v2(-166.457,30.762) -165.667,29.972 -163.871,29.972 P+_U_KEY3.1@-163.744,29.845 -163.659,29.845 -163.532,29.972 D1_U_KEY3.1@-163.532,32.004 ; v2(-153.076,-50.256) -152.902,-50.082 -150.031,-50.082 -149.987,-50.038 D1_U_KEY39.1@-149.987,-52.451 ; v2(-152.979,-10.145) -152.542,-10.145 P+_U_KEY27.1@-150.495,-12.192 ; P+_U_KEY27.1@-150.177,-12.509 -148.435,-10.767 D1_U_KEY27.1@-148.435,-10.659 ; v2(-147.701,8.621) -147.651,8.621 P+_U_KEY15.1@-145.761,6.731 -145.696,6.731 D1_U_KEY15.1@-144.395,8.032 ; v2(-147.28,30.635) -146.49,29.845 -144.694,29.845 P+_U_KEY4.1@-144.567,29.718 -144.482,29.718 -144.355,29.845 D1_U_KEY4.1@-144.355,31.877 ; v2(-133.929,-10.239) -133.398,-10.239 P+_U_KEY28.1@-131.445,-12.192 ; v2(-133.137,-50.256) -132.853,-49.972 -130.493,-49.972 P+_U_KEY40.1@-130.366,-49.845 ; P+_U_KEY28.1@-131.099,-12.359 D1_U_KEY28.1@-129.428,-10.689 ; D1_U_KEY40.1@-129.924,-52.341 P+_U_KEY40.1@-129.924,-49.928 ; v2(-128.27,8.509) -126.492,6.731 P+_U_KEY16.1@-126.401,6.731 -126.336,6.731 D1_U_KEY16.1@-125.035,8.032 ; v2(-128.23,30.762) -128.23,30.716 -127.486,29.972 -125.898,29.972 P+_U_KEY5.1@-125.771,29.845 -125.686,29.845 -125.559,29.972 D1_U_KEY5.1@-125.559,32.004 ; v2(-115.178,-50.171) -114.962,-49.955 -112.583,-49.955 P+_U_KEY41.1@-112.456,-49.828 ; v2(-114.554,-10.287) -114.226,-10.287 -112.575,-11.938 P+_U_KEY29.1@-112.395,-11.938 ; D1_U_KEY41.1@-112.014,-52.324 P+_U_KEY41.1@-112.014,-49.911 ; P+_U_KEY29.1@-112.014,-12.319 D1_U_KEY29.1@-110.335,-10.64 ; v2(-109.347,8.255) -107.823,6.731 P+_U_KEY17.1@-107.647,6.731 -107.582,6.731 D1_U_KEY17.1@-106.281,8.032 ; v2(-109.18,30.635) -108.72,30.175 -106.848,30.175 P+_U_KEY6.1@-106.721,30.048 -106.636,30.048 -106.509,30.175 D1_U_KEY6.1@-106.509,32.207 ; v2(-98.552,-68.199) -98.051,-67.698 -95.455,-67.698 P+_U_KEY42.1@-95.328,-67.571 ; v2(-95.504,-10.287) -95.25,-10.287 P+_U_KEY30.1@-93.472,-12.065 ; D1_U_KEY42.1@-94.886,-70.068 P+_U_KEY42.1@-94.886,-67.655 ; P+_U_KEY30.1@-93.071,-12.319 D1_U_KEY30.1@-91.412,-10.659 ; v2(-90.297,8.382) -88.646,6.731 P+_U_KEY18.1@-88.616,6.731 -88.551,6.731 D1_U_KEY18.1@-87.25,8.032 ; v2(-89.241,30.762) -88.654,30.175 -86.909,30.175 P+_U_KEY7.1@-86.782,30.048 ; P+_U_KEY7.1@-86.57,30.175 D1_U_KEY7.1@-86.57,32.207 ; v2(-86.233,-50.038) -86.224,-50.047 P+_U_KEY43.1@-83.754,-50.047 ; D1_U_KEY43.1@-83.312,-52.543 P+_U_KEY43.1@-83.312,-50.13 ; v2(-76.398,-10.239) -76.248,-10.239 P+_U_KEY31.1@-74.422,-12.065 ; v2(-74.295,-50.165) -71.12,-50.165 D1_U_KEY44.1@-71.12,-52.578 ; P+_U_KEY31.1@-73.981,-12.453 -72.444,-10.916 D1_U_KEY31.1@-72.444,-10.741 ; v2(-71.12,8.382) -69.505,6.767 P+_U_KEY19.1@-69.505,6.731 -69.439,6.731 D1_U_KEY19.1@-68.138,8.032 ; v2(-70.191,30.762) -69.604,30.175 -67.859,30.175 P+_U_KEY8.1@-67.732,30.048 -67.647,30.048 -67.52,30.175 D1_U_KEY8.1@-67.52,32.207 ; v2(-58.227,-50.123) -58.093,-49.99 P+_U_KEY45.1@-54.732,-49.99 -54.373,-49.99 -54.29,-50.073 D1_U_KEY45.1@-54.29,-52.486 ; v2(-57.602,-10.239) -56.944,-10.239 P+_U_KEY32.1@-55.118,-12.065 ; P+_U_KEY32.1@-54.737,-12.446 -52.931,-10.64 D1_U_KEY32.1@-52.931,-10.532 ; v2(-51.943,8.128) -50.546,6.731 P+_U_KEY20.1@-50.384,6.731 -50.319,6.731 D1_U_KEY20.1@-49.018,8.032 ; v2(-51.522,30.762) -50.971,30.211 -49.257,30.211 P+_U_KEY9.1@-49.13,30.084 -49.044,30.084 -48.917,30.211 D1_U_KEY9.1@-48.917,32.243 ; v2(-39.187,-10.239) -38.327,-10.239 -36.502,-12.065 P+_U_KEY33.1@-36.322,-12.065 ; v2(-38.227,-50.038) -37.798,-49.609 -35.462,-49.609 P+_U_KEY46.1@-35.335,-49.482 ; P+_U_KEY33.1@-35.858,-12.475 -34.051,-10.669 D1_U_KEY33.1@-34.051,-10.562 ; D1_U_KEY46.1@-34.893,-51.978 P+_U_KEY46.1@-34.893,-49.565 ; v2(-32.893,8.382) -31.242,6.731 P+_U_KEY21.1@-31.212,6.731 -31.147,6.731 D1_U_KEY21.1@-29.846,8.032 ; v2(-32.726,30.762) -32.449,30.485 -30.521,30.485 P+_U_KEY10.1@-30.394,30.358 -30.309,30.358 -30.182,30.485 D1_U_KEY10.1@-30.182,32.517 ; v2(-25.462,-68.422) -25.283,-68.243 -22.269,-68.243 -22.225,-68.199 D1_U_KEY49.1@-22.225,-70.612 ; v2(-19.375,-10.239) -18.971,-10.239 P+_U_KEY34.1@-17.145,-12.065 ; P+_U_KEY34.1@-16.65,-12.507 -15.113,-10.969 D1_U_KEY34.1@-15.113,-10.668 ; v2(-14.224,-50.038) -13.905,-49.719 -11.591,-49.719 P+_U_KEY47.1@-11.464,-49.592 ; v2(-14.057,30.762) -13.902,30.607 -11.852,30.607 P+_U_KEY11.1@-11.725,30.48 -11.64,30.48 -11.513,30.607 D1_U_KEY11.1@-11.513,32.639 ; v2(-13.589,8.255) -12.157,6.823 P+_U_KEY22.1@-12.157,6.731 -12.092,6.731 D1_U_KEY22.1@-10.791,8.032 ; D1_U_KEY47.1@-11.022,-52.088 P+_U_KEY47.1@-11.022,-49.675 ; v2(-1.713,-68.422) -1.626,-68.335 0.701,-68.335 P+_U_KEY50.1@0.828,-68.208 ; v2(-0.452,-10.239) 0.079,-10.239 P+_U_KEY35.1@2.159,-12.319 ; D1_U_KEY50.1@1.27,-70.704 P+_U_KEY50.1@1.27,-68.291 ; P+_U_KEY35.1@2.512,-12.557 4.318,-10.751 D1_U_KEY35.1@4.318,-10.643 ; v2(5.374,30.762) 5.783,30.353 7.874,30.353 P+_U_KEY12.1@8.001,30.226 8.087,30.226 8.214,30.353 D1_U_KEY12.1@8.214,32.385 ; v2(5.461,7.747) 5.533,7.747 7.194,6.086 P+_U_KEY23.1@7.373,6.086 7.439,6.086 D1_U_KEY23.1@8.739,7.387 ; v2(10.541,-50.419) 10.843,-50.117 13.233,-50.117 P+_U_KEY48.1@13.36,-49.99 ; D1_U_KEY48.1@13.802,-52.486 P+_U_KEY48.1@13.802,-50.073 ; v2(23.306,-68.676) 23.341,-68.641 26.35,-68.641 26.394,-68.597 D1_U_KEY51.1@26.394,-71.01 ; v2(24.678,30.762) 26.961,30.762 P+_U_KEY13.1@27.01,30.81 27.095,30.81 27.222,30.937 D1_U_KEY13.1@27.222,32.969 ; v2(26.659,-11.25) 26.692,-11.25 28.268,-12.827 P+_U_KEY36.1@28.448,-12.827 ; 29.357,-12.573 31.163,-10.767 D1_U_KEY36.1@31.163,-10.659
  Layer 2 w1.27: v2(-234.95,29.972) -234.061,30.861 v2@5.588,30.861 ; v2(-222.123,-9.398) -192.175,-9.398 v2(-191.333,-10.239) -190.619,-9.525 -172.871,-9.525 -172.348,-10.048 v2(-172.156,-10.048) ; v2(-191.958,-50.123) -191.91,-50.171 v2(-115.178,-50.171) -113.267,-48.26 -88.011,-48.26 v2(-86.233,-50.038) -86.148,-50.123 -74.337,-50.123 v2(-74.295,-50.165) -74.253,-50.123 v2(-58.227,-50.123) v2@-38.312,-50.123 ; v2@-172.267,-10.129 -172.156,-10.239 -171.442,-9.525 -153.694,-9.525 -153.074,-10.145 v2(-152.979,-10.145) ; v2(-167.132,8.763) -166.243,9.652 -148.717,9.652 v2@-147.701,8.636 ; v2@-152.932,-10.192 -152.265,-9.525 -134.644,-9.525 v2(-133.929,-10.239) -133.215,-9.525 -115.316,-9.525 v2(-114.554,-10.287) -113.665,-9.398 -96.393,-9.398 v2(-95.504,-10.287) -94.615,-9.398 -77.24,-9.398 v2(-76.398,-10.239) -75.557,-9.398 -58.444,-9.398 v2(-57.602,-10.239) -56.888,-9.525 -39.902,-9.525 v2(-39.187,-10.239) -38.473,-9.525 -20.09,-9.525 v2(-19.375,-10.239) -18.661,-9.525 -1.167,-9.525 v2(-0.452,-10.239) 0.135,-9.652 25.019,-9.652 v2@26.543,-11.176 ; v2(-147.701,8.621) v2@-147.701,8.636 ; v2(-98.552,-68.199) -25.685,-68.199 v2(-25.462,-68.422) v2(-1.713,-68.422) -1.459,-68.676 v2(23.306,-68.676) 16.51,-61.88 16.51,-56.388 v2(10.541,-50.419) ; v2(-38.227,-50.038) -36.449,-48.26 -16.002,-48.26 v2(-14.224,-50.038) -12.446,-48.26 8.382,-48.26 v2(10.541,-50.419) ; 5.969,30.861 32.385,30.861 38.227,25.019 38.227,-0.127 v2@26.881,-11.473 ; v2@-147.701,8.636 -146.685,9.652 -130.045,9.652 -128.902,8.509 v2(-128.27,8.509) -127,9.779 -111.122,9.779 -109.598,8.255 v2(-109.347,8.255) -107.823,9.779 -92.072,9.779 -90.675,8.382 v2(-90.297,8.382) -88.9,9.779 -72.517,9.779 v2(-71.12,8.382) -69.723,9.779 -53.594,9.779 v2(-51.943,8.128) -49.911,10.16 -34.671,10.16 v2(-32.893,8.382) -31.369,9.906 -15.24,9.906 v2(-13.589,8.255) -11.938,9.906 3.302,9.906 v2(5.461,7.747) 21.209,7.747 26.924,2.032 26.924,-10.985 v2(26.659,-11.25) v2@26.881,-11.473 ; v2(10.541,-50.419) 17.368,-50.419 30.657,-37.13 30.657,-15.249 v2@26.881,-11.473
pads on no net: MCP1.11 MCP1.14 MCP1.19 MCP1.20 MCP2.11 MCP2.14 MCP2.19 MCP2.20 MCP3.11 MCP3.14 MCP3.19 MCP3.20 MCP3.28 MS1.1 MS1.4 MS1.7 MS1.9 MS1.10 MS1.14 MS1.16 MS1.17 MS2.1 MS2.4 MS2.7 MS2.9 MS2.10 MS2.14 MS2.16 MS2.17 MS3.1 MS3.4 MS3.7 MS3.9 MS3.10 MS3.14 MS3.16 MS3.17 MS4.1 MS4.4 MS4.7 MS4.9 MS4.10 MS4.14 MS4.16 MS4.17 MS5.1 MS5.4 MS5.7 MS5.9 MS5.10 MS5.14 MS5.16 MS5.17 MS6.1 MS6.4 MS6.7 MS6.9 MS6.10 MS6.14 MS6.16 MS6.17 MS7.1 MS7.4 MS7.7 MS7.9 MS7.10 MS7.14 MS7.16 MS7.17 MS8.1 MS8.4 MS8.7 MS8.9 MS8.10 MS8.14 MS8.16 MS8.17 SW1.5 U2.4 U3.6 U3.7 U3.8 U3.34 U3.38 U3.40 U3.41 U4.0

## Polygon pours and split planes (outlines as drawn)
GND on Layer 1 "GND_L02_P001" (solid, remove dead copper, pour order 1): -285.496,-31.877 -285.496,10.668 -276.86,10.668 -276.86,65.151 39.878,65.151 39.878,-84.328 -276.733,-84.328 -276.733,-31.877
GND on Layer 2 "GND_L03_P002" (solid, remove dead copper, pour order 2): -285.496,-31.877 -285.496,10.668 -276.86,10.668 -276.86,65.151 39.878,65.151 39.878,-84.328 -276.733,-84.328 -276.733,-31.877
GND on Bottom Layer "GND_L04_P003" (solid, remove dead copper, pour order 3): -285.496,-31.877 -285.496,10.668 -276.86,10.668 -276.86,65.151 39.878,65.151 39.878,-84.328 -276.733,-84.328 -276.733,-31.877
GND on Top Layer "GND_L01_P000" (solid, remove dead copper, pour order 0): -285.496,-31.877 -285.496,10.668 -276.86,10.668 -276.86,65.151 39.878,65.151 39.878,-84.328 -276.733,-84.328 -276.733,-31.877

## Keep-outs
Keep-Out Layer:
  circle w0.254: c-142.88,19.55 r8.25
  circle w0.254: c9.52,19.55 r8.25
  circle w0.254: c-21.43,-57.53 r8.25
  circle w0.254: c2.38,-57.53 r8.25
  circle w0.254: c27.455,-57.53 r8.25
  circle w0.254: c16.73,-38.1 r8.25
  circle w0.254: c-14.29,-38.1 r8.25
  circle w0.254: c21.495,-19.05 r8.25
  circle w0.254: c28.645,19.55 r8.25
  circle w0.254: c-9.53,19.55 r8.25
  circle w0.254: c-28.58,19.55 r8.25
  circle w0.254: c-104.78,19.55 r8.25
  circle w0.254: c-161.93,19.55 r8.25
  circle w0.254: c-123.83,19.55 r8.25
  circle w0.254: c-47.63,19.55 r8.25
  circle w0.254: c-85.73,19.55 r8.25
  circle w0.254: c-66.68,19.55 r8.25
  circle w0.254: c-92.87,-57.53 r8.25
  circle w0.254: c-185.74,-38.1 r8.25
  circle w0.254: c-166.69,-38.1 r8.25
  circle w0.254: c-147.64,-38.1 r8.25
  circle w0.254: c-226.28,-19.05 r8.25
  circle w0.254: c-195.26,-19.05 r8.25
  circle w0.254: c-176.21,-19.05 r8.25
  circle w0.254: c-228.66,19.55 r8.25
  circle w0.254: c-109.54,-38.1 r8.25
  circle w0.254: c-180.98,19.55 r8.25
  circle w0.254: c-128.59,-38.1 r8.25
  circle w0.254: c-90.49,-38.1 r8.25
  circle w0.254: c-71.44,-38.1 r8.25
  circle w0.254: c-52.39,-38.1 r8.25
  circle w0.254: c-33.34,-38.1 r8.25
  circle w0.254: c-4.76,-19.05 r8.25
  circle w0.254: c-23.81,-19.05 r8.25
  circle w0.254: c-42.86,-19.05 r8.25
  circle w0.254: c-61.91,-19.05 r8.25
  circle w0.254: c-80.96,-19.05 r8.25
  circle w0.254: c-100.01,-19.05 r8.25
  circle w0.254: c-119.06,-19.05 r8.25
  circle w0.254: c-138.11,-19.05 r8.25
  circle w0.254: c-157.16,-19.05 r8.25
  circle w0.254: c-19.05,0 r8.25
  circle w0.254: c-38.1,0 r8.25
  circle w0.254: c-57.15,0 r8.25
  circle w0.254: c-76.2,0 r8.25
  circle w0.254: c-95.25,0 r8.25
  circle w0.254: c-114.3,0 r8.25
  circle w0.254: c-133.35,0 r8.25
  circle w0.254: c-152.4,0 r8.25
  circle w0.254: c0,0 r8.25
  circle w0.254: c-171.45,0 r8.25
  lines w0.254: -285.496,-31.877 -285.496,10.668 -276.86,10.668 -276.86,65.151 39.878,65.151 39.878,-84.328 -276.733,-84.328 -276.733,-31.877 -285.496,-31.877

## Other copper
Multi-Layer:
  pour cut-out: -276.86,-33.02 -276.86,15.748 -286.512,15.748 -286.512,-33.02

## Text inside footprints (layer, text, board x,y; h text height)
U3: Mechanical 13 "Toplayer no ground pad" at -282.702,-4.826 h0.51 r90; Mechanical 13 "No ground pad" at -279.781,-3.429 h0.64 r90